# Altium PCB LC_LPF_PI.PcbDoc
Units mm, origin at the board's own origin, x right, y up, seen from the top; angles counter-clockwise.
Board outline 239 x 65.7 mm, 2 copper layers (Top Layer, Bottom Layer); 125 components, 51 nets, 250 pads, 73 vias.
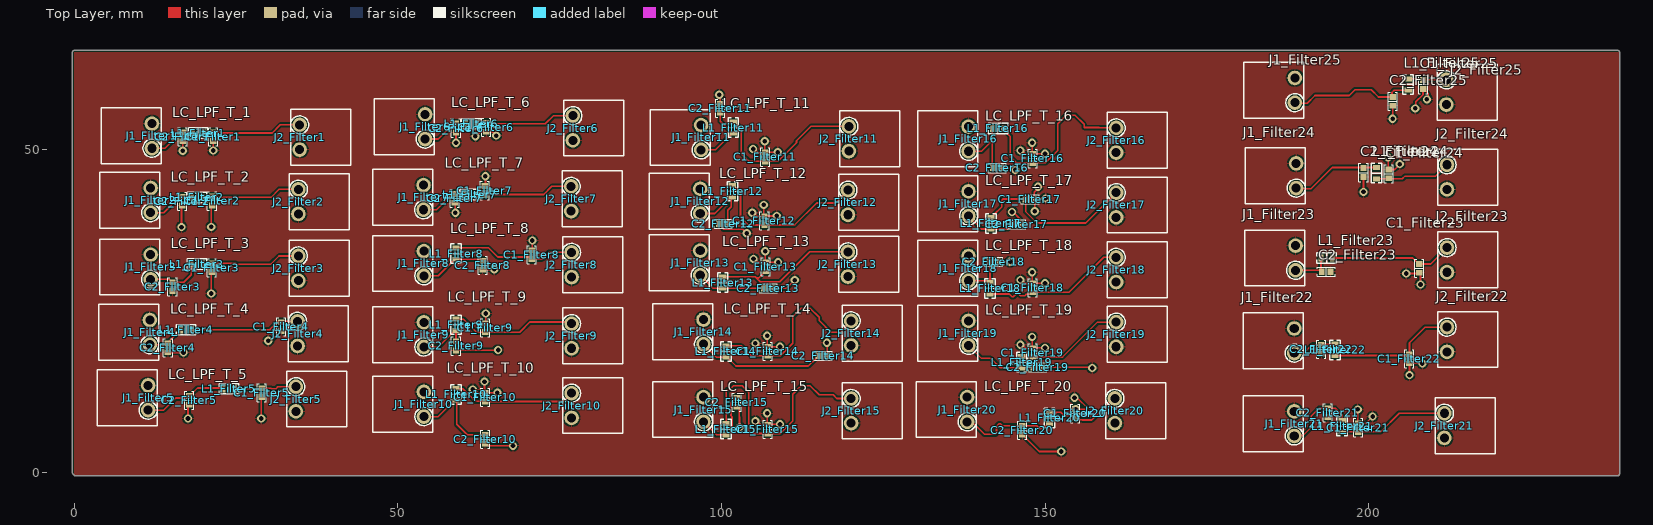
[diagram p0: Top Layer view]
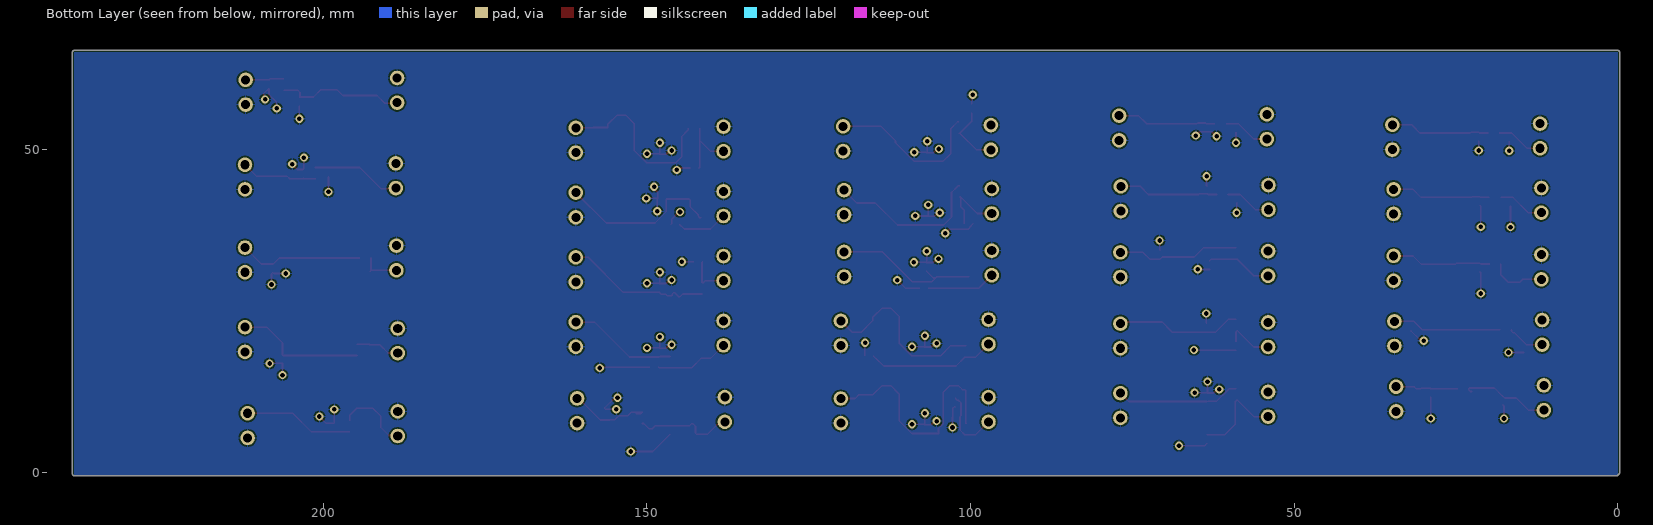
[diagram p1: Bottom Layer view, seen from below]
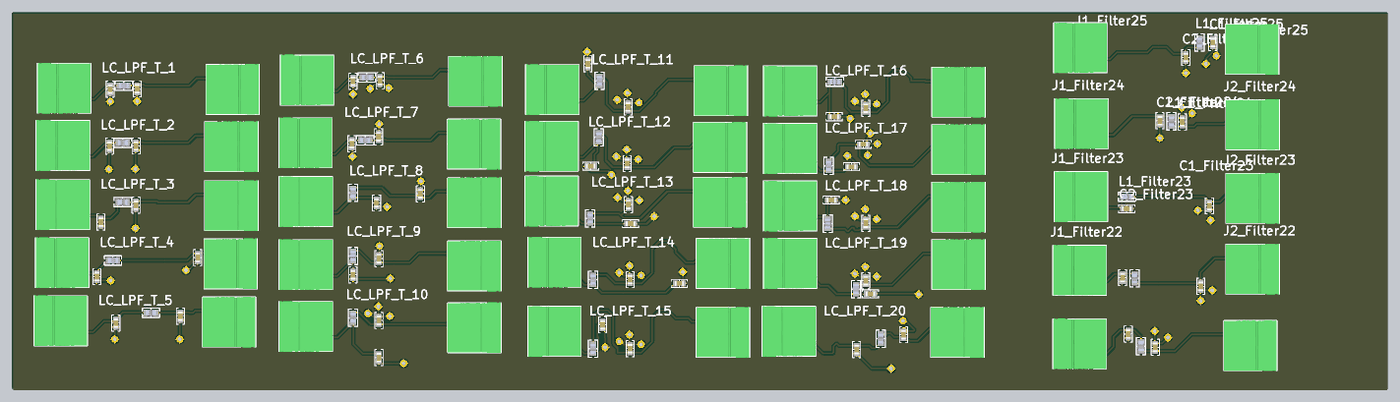
[diagram p2: 3D render of the assembled board from above, using the file's embedded part models]

## Layer stack, top to bottom
Top Solder: solder mask 0.0102, Solder Resist, Dk 3.5
Top Layer: signal copper 0.0356
Dielectric 1: dielectric 0.32, FR-4, Dk 4.8
Bottom Layer: signal copper 0.0356
Bottom Solder: solder mask 0.0102, Solder Resist, Dk 3.5

## Board outline
-0.046,-0.246 cw(c0,0) -0.25,0 -0.25,65 cw(c0,65) 0,65.25 238.5,65.25 cw(c238.5,65) 238.75,65 238.75,-0.2 cw(c238.5,-0.2) 238.5,-0.45 0.2,-0.45 cw(c0.2,-0.2)

## Design rules (kind name [scope] priority, off if disabled: settings)
Clearance [All] p1: gap=0.254 ignorepadtopadclearanceinfootprint=FALSE except(0: Arc-Hole Track-Hole SMDPad-Hole THPad-Hole Via-Hole Fill-Hole Poly-Hole Region-Hole Text-Hole)
PolygonConnect [All] p1: connectstyle=Relief reliefconductorwidth=0.254 reliefentries=4 polygonreliefangle="90 Angle" airgapwidth=0.254
RoutingVias [All] p1: holewidth=0.711 width=1.27 viastyle="Through Hole" minholewidth=0.711 minwidth=1.27 maxholewidth=0.711 maxwidth=1.27
SolderMaskExpansion [All] p1: expansion=0.102 istentingtop=FALSE
Width [All] p1: maxlimit=0.254 minlimit=0.254 preferedwidth=0.254
30 further rules are at their usual default settings.

## Classes and differential pairs
component class Filter25: C1_Filter25 C2_Filter25 J1_Filter25 J2_Filter25 L1_Filter25
component class Filter24: C1_Filter24 C2_Filter24 J1_Filter24 J2_Filter24 L1_Filter24
component class Filter23: C1_Filter23 C2_Filter23 J1_Filter23 J2_Filter23 L1_Filter23
component class Filter22: C1_Filter22 C2_Filter22 J1_Filter22 J2_Filter22 L1_Filter22
component class Filter21: C1_Filter21 C2_Filter21 J1_Filter21 J2_Filter21 L1_Filter21
channel class LC_LPF_PI: Filter1 Filter2 Filter3 Filter4 Filter5 Filter6 Filter7 Filter8 Filter9 Filter10 Filter11 Filter12 Filter13 Filter14 Filter15 Filter16 Filter17 Filter18 Filter19 Filter20 Filter21 Filter22 Filter23 Filter24 Filter25
component class Filter20: C1_Filter20 C2_Filter20 J1_Filter20 J2_Filter20 L1_Filter20
component class Filter19: C1_Filter19 C2_Filter19 J1_Filter19 J2_Filter19 L1_Filter19
component class Filter18: C1_Filter18 C2_Filter18 J1_Filter18 J2_Filter18 L1_Filter18
component class Filter17: C1_Filter17 C2_Filter17 J1_Filter17 J2_Filter17 L1_Filter17
component class Filter16: C1_Filter16 C2_Filter16 J1_Filter16 J2_Filter16 L1_Filter16
component class Filter15: C1_Filter15 C2_Filter15 J1_Filter15 J2_Filter15 L1_Filter15
component class Filter14: C1_Filter14 C2_Filter14 J1_Filter14 J2_Filter14 L1_Filter14
component class Filter13: C1_Filter13 C2_Filter13 J1_Filter13 J2_Filter13 L1_Filter13
component class Filter12: C1_Filter12 C2_Filter12 J1_Filter12 J2_Filter12 L1_Filter12
component class Filter11: C1_Filter11 C2_Filter11 J1_Filter11 J2_Filter11 L1_Filter11
component class Filter10: C1_Filter10 C2_Filter10 J1_Filter10 J2_Filter10 L1_Filter10
component class Filter9: C1_Filter9 C2_Filter9 J1_Filter9 J2_Filter9 L1_Filter9
component class Filter8: C1_Filter8 C2_Filter8 J1_Filter8 J2_Filter8 L1_Filter8
component class Filter7: C1_Filter7 C2_Filter7 J1_Filter7 J2_Filter7 L1_Filter7
component class Filter6: C1_Filter6 C2_Filter6 J1_Filter6 J2_Filter6 L1_Filter6
component class Filter5: C1_Filter5 C2_Filter5 J1_Filter5 J2_Filter5 L1_Filter5
component class Filter4: C1_Filter4 C2_Filter4 J1_Filter4 J2_Filter4 L1_Filter4
component class Filter3: C1_Filter3 C2_Filter3 J1_Filter3 J2_Filter3 L1_Filter3
component class Filter2: C1_Filter2 C2_Filter2 J1_Filter2 J2_Filter2 L1_Filter2
component class Filter1: C1_Filter1 C2_Filter1 J1_Filter1 J2_Filter1 L1_Filter1

## Components (designator, comment, footprint, x,y, rotation, side; value= is the part's Value field where it differs from the comment)
C1_Filter1 "10 µF" "CAP 0603_1608" 21.5,51.95 r90 top (schematic designator C1)
C1_Filter2 "10 µF" "CAP 0603_1608" 21.305,42.002 r90 top (schematic designator C1)
C1_Filter3 "10 µF" "CAP 0603_1608" 21.293,31.706 r90 top (schematic designator C1)
C1_Filter4 "10 µF" "CAP 0603_1608" 32,22.6 r90 top (schematic designator C1)
C1_Filter5 "10 µF" "CAP 0603_1608" 29.005,12.402 r90 top (schematic designator C1)
C1_Filter6 "10 µF" "CAP 0603_1608" 63.705,53.375 r90 top (schematic designator C1)
C1_Filter7 "10 µF" "CAP 0603_1608" 63.445,43.617 r270 top (schematic designator C1)
C1_Filter8 "10 µF" "CAP 0603_1608" 70.7,33.7 r270 top (schematic designator C1)
C1_Filter9 "10 µF" "CAP 0603_1608" 63.5,22.417 r270 top (schematic designator C1)
C1_Filter10 "10 µF" "CAP 0603_1608" 63.5,11.667 r270 top (schematic designator C1)
C1_Filter11 "10 µF" "CAP 0603_1608" 106.8,48.8 r270 top (schematic designator C1)
C1_Filter12 "10 µF" "CAP 0603_1608" 106.658,38.958 r270 top (schematic designator C1)
C1_Filter13 "10 µF" "CAP 0603_1608" 106.858,31.816 r270 top (schematic designator C1)
C1_Filter14 "10 µF" "CAP 0603_1608" 107.158,18.764 r270 top (schematic designator C1)
C1_Filter15 "10 µF" "CAP 0603_1608" 107.158,6.764 r270 top (schematic designator C1)
C1_Filter16 "10 µF" "CAP 0603_1608" 148.1,48.569 r270 top (schematic designator C1)
C1_Filter17 "10 µF" "CAP 0603_1608" 147.669,42.3 r180 top (schematic designator C1)
C1_Filter18 "10 µF" "CAP 0603_1608" 148.1,28.569 r270 top (schematic designator C1)
C1_Filter19 "10 µF" "CAP 0603_1608" 148.1,18.569 r270 top (schematic designator C1)
C1_Filter20 "10 µF" "CAP 0603_1608" 154.65,9.175 r270 top (schematic designator C1)
C1_Filter21 "10 µF" "CAP 0603_1608" 198.4,7 r270 top (schematic designator C1)
C1_Filter22 "10 µF" "CAP 0603_1608" 206.3,17.6 r90 top (schematic designator C1)
C1_Filter23 "10 µF" "CAP 0603_1608" 207.8,31.6 r90 top (schematic designator C1)
C1_Filter24 "10 µF" "CAP 0603_1608" 203.1,46.2 r270 top (schematic designator C1)
C1_Filter25 "10 µF" "CAP 0603_1608" 208.4,60 r90 top (schematic designator C1)
C2_Filter1 "10 µF" "CAP 0603_1608" 16.8,51.9 r90 top (schematic designator C2)
C2_Filter2 "10 µF" "CAP 0603_1608" 16.7,41.975 r90 top (schematic designator C2)
C2_Filter3 "10 µF" "CAP 0603_1608" 15.2,28.775 r90 top (schematic designator C2)
C2_Filter4 "10 µF" "CAP 0603_1608" 14.5,19.3 r90 top (schematic designator C2)
C2_Filter5 "10 µF" "CAP 0603_1608" 17.8,11.2 r90 top (schematic designator C2)
C2_Filter6 "10 µF" "CAP 0603_1608" 59,53.275 r90 top (schematic designator C2)
C2_Filter7 "10 µF" "CAP 0603_1608" 58.8,42.4 r90 top (schematic designator C2)
C2_Filter8 "10 µF" "CAP 0603_1608" 63.1,32.1 r90 top (schematic designator C2)
C2_Filter9 "10 µF" "CAP 0603_1608" 59,19.6 r90 top (schematic designator C2)
C2_Filter10 "10 µF" "CAP 0603_1608" 63.5,5.2 r90 top (schematic designator C2)
C2_Filter11 "10 µF" "CAP 0603_1608" 99.8,56.3 r270 top (schematic designator C2)
C2_Filter12 "10 µF" "CAP 0603_1608" 100.3,38.5 r0 top (schematic designator C2)
C2_Filter13 "10 µF" "CAP 0603_1608" 107.225,28.5 r180 top (schematic designator C2)
C2_Filter14 "10 µF" "CAP 0603_1608" 115.7,18.1 r180 top (schematic designator C2)
C2_Filter15 "10 µF" "CAP 0603_1608" 102.362,10.885 r90 top (schematic designator C2)
C2_Filter16 "10 µF" "CAP 0603_1608" 142.625,47.1 r180 top (schematic designator C2)
C2_Filter17 "10 µF" "CAP 0603_1608" 145.6,38.4 r180 top (schematic designator C2)
C2_Filter18 "10 µF" "CAP 0603_1608" 142.1,32.6 r180 top (schematic designator C2)
C2_Filter19 "10 µF" "CAP 0603_1608" 148.9,16.3 r180 top (schematic designator C2)
C2_Filter20 "10 µF" "CAP 0603_1608" 146.5,6.6 r90 top (schematic designator C2)
C2_Filter21 "10 µF" "CAP 0603_1608" 193.7,9.3 r90 top (schematic designator C2)
C2_Filter22 "10 µF" "CAP 0603_1608" 192.7,19.1 r90 top (schematic designator C2)
C2_Filter23 "10 µF" "CAP 0603_1608" 193.425,31.1 r180 top (schematic designator C2)
C2_Filter24 "10 µF" "CAP 0603_1608" 199.2,46.4 r90 top (schematic designator C2)
C2_Filter25 "10 µF" "CAP 0603_1608" 203.7,57.4 r90 top (schematic designator C2)
J1_Filter1 "OQ0232510000G" "FCI 06-381-2PIN" 8.726,52.049 r90 top (schematic designator J1)
J1_Filter2 "OQ0232510000G" "FCI 06-381-2PIN" 8.531,42.101 r90 top (schematic designator J1)
J1_Filter3 "OQ0232510000G" "FCI 06-381-2PIN" 8.519,31.805 r90 top (schematic designator J1)
J1_Filter4 "OQ0232510000G" "FCI 06-381-2PIN" 8.394,21.705 r90 top (schematic designator J1)
J1_Filter5 "OQ0232510000G" "FCI 06-381-2PIN" 8.131,11.601 r90 top (schematic designator J1)
J1_Filter6 "OQ0232510000G" "FCI 06-381-2PIN" 50.931,53.474 r90 top (schematic designator J1)
J1_Filter7 "OQ0232510000G" "FCI 06-381-2PIN" 50.676,42.549 r90 top (schematic designator J1)
J1_Filter8 "OQ0232510000G" "FCI 06-381-2PIN" 50.731,32.349 r90 top (schematic designator J1)
J1_Filter9 "OQ0232510000G" "FCI 06-381-2PIN" 50.731,21.349 r90 top (schematic designator J1)
J1_Filter10 "OQ0232510000G" "FCI 06-381-2PIN" 50.731,10.599 r90 top (schematic designator J1)
J1_Filter11 "OQ0232510000G" "FCI 06-381-2PIN" 93.573,51.816 r90 top (schematic designator J1)
J1_Filter12 "OQ0232510000G" "FCI 06-381-2PIN" 93.431,41.974 r90 top (schematic designator J1)
J1_Filter13 "OQ0232510000G" "FCI 06-381-2PIN" 93.431,32.432 r90 top (schematic designator J1)
J1_Filter14 "OQ0232510000G" "FCI 06-381-2PIN" 93.931,21.78 r90 top (schematic designator J1)
J1_Filter15 "OQ0232510000G" "FCI 06-381-2PIN" 93.931,9.78 r90 top (schematic designator J1)
J1_Filter16 "OQ0232510000G" "FCI 06-381-2PIN" 134.873,51.585 r90 top (schematic designator J1)
J1_Filter17 "OQ0232510000G" "FCI 06-381-2PIN" 134.873,41.585 r90 top (schematic designator J1)
J1_Filter18 "OQ0232510000G" "FCI 06-381-2PIN" 134.873,31.585 r90 top (schematic designator J1)
J1_Filter19 "OQ0232510000G" "FCI 06-381-2PIN" 134.873,21.585 r90 top (schematic designator J1)
J1_Filter20 "OQ0232510000G" "FCI 06-381-2PIN" 134.673,9.785 r90 top (schematic designator J1)
J1_Filter21 "OQ0232510000G" "FCI 06-381-2PIN" 185.2,7.6 r90 top (schematic designator J1)
J1_Filter22 "OQ0232510000G" "FCI 06-381-2PIN" 185.2,20.4 r90 top (schematic designator J1)
J1_Filter23 "OQ0232510000G" "FCI 06-381-2PIN" 185.4,33.2 r90 top (schematic designator J1)
J1_Filter24 "OQ0232510000G" "FCI 06-381-2PIN" 185.5,45.9 r90 top (schematic designator J1)
J1_Filter25 "OQ0232510000G" "FCI 06-381-2PIN" 185.3,59.1 r90 top (schematic designator J1)
J2_Filter1 "OQ0232510000G" "FCI 06-381-2PIN" 38.15,51.85 r270 top (schematic designator J2)
J2_Filter2 "OQ0232510000G" "FCI 06-381-2PIN" 37.955,41.902 r270 top (schematic designator J2)
J2_Filter3 "OQ0232510000G" "FCI 06-381-2PIN" 37.943,31.606 r270 top (schematic designator J2)
J2_Filter4 "OQ0232510000G" "FCI 06-381-2PIN" 37.818,21.506 r270 top (schematic designator J2)
J2_Filter5 "OQ0232510000G" "FCI 06-381-2PIN" 37.555,11.402 r270 top (schematic designator J2)
J2_Filter6 "OQ0232510000G" "FCI 06-381-2PIN" 80.355,53.275 r270 top (schematic designator J2)
J2_Filter7 "OQ0232510000G" "FCI 06-381-2PIN" 80.1,42.35 r270 top (schematic designator J2)
J2_Filter8 "OQ0232510000G" "FCI 06-381-2PIN" 80.155,32.15 r270 top (schematic designator J2)
J2_Filter9 "OQ0232510000G" "FCI 06-381-2PIN" 80.155,21.15 r270 top (schematic designator J2)
J2_Filter10 "OQ0232510000G" "FCI 06-381-2PIN" 80.155,10.4 r270 top (schematic designator J2)
J2_Filter11 "OQ0232510000G" "FCI 06-381-2PIN" 122.997,51.617 r270 top (schematic designator J2)
J2_Filter12 "OQ0232510000G" "FCI 06-381-2PIN" 122.855,41.775 r270 top (schematic designator J2)
J2_Filter13 "OQ0232510000G" "FCI 06-381-2PIN" 122.855,32.233 r270 top (schematic designator J2)
J2_Filter14 "OQ0232510000G" "FCI 06-381-2PIN" 123.355,21.581 r270 top (schematic designator J2)
J2_Filter15 "OQ0232510000G" "FCI 06-381-2PIN" 123.355,9.581 r270 top (schematic designator J2)
J2_Filter16 "OQ0232510000G" "FCI 06-381-2PIN" 164.297,51.386 r270 top (schematic designator J2)
J2_Filter17 "OQ0232510000G" "FCI 06-381-2PIN" 164.297,41.386 r270 top (schematic designator J2)
J2_Filter18 "OQ0232510000G" "FCI 06-381-2PIN" 164.297,31.386 r270 top (schematic designator J2)
J2_Filter19 "OQ0232510000G" "FCI 06-381-2PIN" 164.297,21.386 r270 top (schematic designator J2)
J2_Filter20 "OQ0232510000G" "FCI 06-381-2PIN" 164.097,9.586 r270 top (schematic designator J2)
J2_Filter21 "OQ0232510000G" "FCI 06-381-2PIN" 215,7.3 r270 top (schematic designator J2)
J2_Filter22 "OQ0232510000G" "FCI 06-381-2PIN" 215.402,20.605 r270 top (schematic designator J2)
J2_Filter23 "OQ0232510000G" "FCI 06-381-2PIN" 215.4,32.9 r270 top (schematic designator J2)
J2_Filter24 "OQ0232510000G" "FCI 06-381-2PIN" 215.402,45.695 r270 top (schematic designator J2)
J2_Filter25 "OQ0232510000G" "FCI 06-381-2PIN" 215.3,58.8 r270 top (schematic designator J2)
L1_Filter1 "47µH" "IND 0603_1608 RF WW" 19.175,52.5 r180 top (schematic designator L1)
L1_Filter2 "47µH" "IND 0603_1608 RF WW" 18.98,42.552 r180 top (schematic designator L1)
L1_Filter3 "47µH" "IND 0603_1608 RF WW" 18.968,32.256 r180 top (schematic designator L1)
L1_Filter4 "47µH" "IND 0603_1608 RF WW" 17.3,22.1 r180 top (schematic designator L1)
L1_Filter5 "47µH" "IND 0603_1608 RF WW" 23.9,13 r180 top (schematic designator L1)
L1_Filter6 "47µH" "IND 0603_1608 RF WW" 61.38,53.925 r180 top (schematic designator L1)
L1_Filter7 "47µH" "IND 0603_1608 RF WW" 61.125,43 r180 top (schematic designator L1)
L1_Filter8 "47µH" "IND 0603_1608 RF WW" 59,33.875 r270 top (schematic designator L1)
L1_Filter9 "47µH" "IND 0603_1608 RF WW" 59,22.875 r270 top (schematic designator L1)
L1_Filter10 "47µH" "IND 0603_1608 RF WW" 59,12.125 r270 top (schematic designator L1)
L1_Filter11 "47µH" "IND 0603_1608 RF WW" 101.842,53.342 r270 top (schematic designator L1)
L1_Filter12 "47µH" "IND 0603_1608 RF WW" 101.7,43.5 r270 top (schematic designator L1)
L1_Filter13 "47µH" "IND 0603_1608 RF WW" 100.2,29.4 r270 top (schematic designator L1)
L1_Filter14 "47µH" "IND 0603_1608 RF WW" 100.7,18.748 r270 top (schematic designator L1)
L1_Filter15 "47µH" "IND 0603_1608 RF WW" 100.7,6.748 r270 top (schematic designator L1)
L1_Filter16 "47µH" "IND 0603_1608 RF WW" 142.725,53.2 r180 top (schematic designator L1)
L1_Filter17 "47µH" "IND 0603_1608 RF WW" 141.642,38.553 r270 top (schematic designator L1)
L1_Filter18 "47µH" "IND 0603_1608 RF WW" 141.5,28.5 r90 top (schematic designator L1)
L1_Filter19 "47µH" "IND 0603_1608 RF WW" 146.4,17.1 r270 top (schematic designator L1)
L1_Filter20 "47µH" "IND 0603_1608 RF WW" 150.7,8.5 r270 top (schematic designator L1)
L1_Filter21 "47µH" "IND 0603_1608 RF WW" 195.9,7.2 r90 top (schematic designator L1)
L1_Filter22 "47µH" "IND 0603_1608 RF WW" 194.8,19 r90 top (schematic designator L1)
L1_Filter23 "47µH" "IND 0603_1608 RF WW" 193.5,33.2 r180 top (schematic designator L1)
L1_Filter24 "47µH" "IND 0603_1608 RF WW" 201.2,46.3 r90 top (schematic designator L1)
L1_Filter25 "47µH" "IND 0603_1608 RF WW" 206.1,60 r270 top (schematic designator L1)

## Footprints (in the part's own frame and the unit in brackets; to place one, negate y for a bottom-side part, rotate by r counter-clockwise, add the part's x,y. Pads: shape width x height; smd on the part's side, far side on the other; paste and mask are expansions set on the pad)
"CAP 0603_1608" [mm] "Chip Capacitor, 2-Leads, Body 1.60x0.80mm, IPC Medium Density"
  rect 0.9x1 smd: 1(-0.675,0) 2(0.675,0)
  silkscreen extent -1.4,-0.7 1.4,0.7, body extent -0.8,-0.41 0.8,0.41, height 0.82
"FCI 06-381-2PIN" [mm] "FCI Pluggable Terminal Block"
  round 2.25 hole 1.4: 1(-1.905,-3.302) 2(1.905,-3.302)
  silkscreen extent -4.32,-4.7 4.32,4.57, body extent -4.4,-4.7 4.4,4.5, height 7.6
"IND 0603_1608 RF WW" [mm] "Chip Inductor, 2-Leads, Body 1.65x0.99mm, IPC Medium Density"
  rect 0.76x1.13 smd: 1(-0.875,0) 2(0.875,0)
  silkscreen extent -1.5,-0.8 1.5,0.8, body extent -0.84,-0.58 0.83,0.58, height 1

## Part data
C1_Filter1 C1_Filter2 C1_Filter3 C1_Filter4 C1_Filter5 C1_Filter6 C1_Filter7 C1_Filter8 C1_Filter9 C1_Filter10 C1_Filter11 C1_Filter12 C1_Filter13 C1_Filter14 C1_Filter15 C1_Filter16 C1_Filter17 C1_Filter18 C1_Filter19 C1_Filter20 C1_Filter21 C1_Filter22 C1_Filter23 C1_Filter24 C1_Filter25 C2_Filter1 C2_Filter2 C2_Filter3 C2_Filter4 C2_Filter5 C2_Filter6 C2_Filter7 C2_Filter8 C2_Filter9 C2_Filter10 C2_Filter11 C2_Filter12 C2_Filter13 C2_Filter14 C2_Filter15 C2_Filter16 C2_Filter17 C2_Filter18 C2_Filter19 C2_Filter20 C2_Filter21 C2_Filter22 C2_Filter23 C2_Filter24 C2_Filter25: library part MD0603BW106M100NHT-EM, "CAP CER 10UF 10V X5R 0603", Device Package="0603 (1608 Metric)", manufacturer="Knowles Novacap", Operating Temperature="-55°C ~ 85°C", Supplier Part Number 1=1763-MD0603BW106M100NHT-EMCT-ND, Temperature Coefficient=X5R, Tolerance=±20%, Voltage - Rated=10V, Applications="Medical, Non-Critical", Capacitance="10 µF", componentlink1description=Datasheet, componentlink1url="https://mm.digikey.com/Volume0/opasdata/d220001/medias/docus/5546/MD Series R3.pdf", componentlink2description="DigiKey Link", componentlink2url=https://www.digikey.com/en/products/detail/knowles-novacap/MD0603BW106M100NHT-EM/21406876, lastupdated="02/11/2023 19:09:18", Lifecycle Status=Active, Minimum Order=1, Mounting Type="Surface Mount, MLCC", Package / Case="0603 (1608 Metric)", packaging=TapeAndReel, Part Number=MD0603BW106M100NHT-EM, partid=56748, price=0.24, series=MD, Supplier 1=DigiKey
J1_Filter1 J1_Filter2 J1_Filter3 J1_Filter4 J1_Filter5 J1_Filter6 J1_Filter7 J1_Filter8 J1_Filter9 J1_Filter10 J1_Filter11 J1_Filter12 J1_Filter13 J1_Filter14 J1_Filter15 J1_Filter16 J1_Filter17 J1_Filter18 J1_Filter19 J1_Filter20 J1_Filter21 J1_Filter22 J1_Filter23 J1_Filter24 J1_Filter25 J2_Filter1 J2_Filter2 J2_Filter3 J2_Filter4 J2_Filter5 J2_Filter6 J2_Filter7 J2_Filter8 J2_Filter9 J2_Filter10 J2_Filter11 J2_Filter12 J2_Filter13 J2_Filter14 J2_Filter15 J2_Filter16 J2_Filter17 J2_Filter18 J2_Filter19 J2_Filter20 J2_Filter21 J2_Filter22 J2_Filter23 J2_Filter24 J2_Filter25: "TERM BLOCK HDR 2POS 90DEG 3.81MM", Color=Green, Current - UL=10A, manufacturer="Amphenol Anytek", Operating Temperature="-40°C ~ 115°C", Supplier Part Number 1=609-3819-ND, Voltage - UL=300V, componentlink1description=Datasheet, componentlink1url=http://portal.fciconnect.com/Comergent//fci/drawing/oqxx32x100j0g.pdf, componentlink2description="DigiKey Link", componentlink2url=//digikey.com/product-detail/en/amphenol-anytek/OQ0232510000G/609-3819-ND/2261255, Contact Mating Finish=Tin, Header Orientation="90°, Right Angle", lastupdated="16/12/2019 19:14:30", Lifecycle Status=0, Minimum Order=1, Mounting Type="Through Hole", Number of Levels=1, Number of Positions=2, packaging=Bulk, Part Number=OQ0232510000G, Part Status=Active, Pitch="0.150\" (3.81mm)", Positions Per Level=2, price=0.49, series=06-381, Supplier 1=DigiKey, Termination Style=Solder, Type="Header, Male Pins, Shrouded (4 Side)"
L1_Filter1 L1_Filter2 L1_Filter3 L1_Filter4 L1_Filter5 L1_Filter6 L1_Filter7 L1_Filter8 L1_Filter9 L1_Filter10 L1_Filter11 L1_Filter12 L1_Filter13 L1_Filter14 L1_Filter15 L1_Filter16 L1_Filter17 L1_Filter18 L1_Filter19 L1_Filter20 L1_Filter21 L1_Filter22 L1_Filter23 L1_Filter24 L1_Filter25: library part L0603B470MPWFT, "INDUCTORPOWER LINE 0603 47H 20%", Current Rating (Amps)=90mA, DC Resistance (DCR)=5.8Ohm, Device Package="0603 (1608 Metric)", Frequency - Self Resonant=11MHz, Inductance Frequency - Test=2.52MHz, manufacturer=KEMET, Operating Temperature="-40°C ~ 105°C", Supplier Part Number 1=399-17776-1-ND, Tolerance=±20%, componentlink1description=Datasheet, componentlink1url=https://api.kemet.com/component-edge/download/datasheet/L0603B470MPWFT.pdf, componentlink2description="DigiKey Link", componentlink2url=http://digikey.com/product-detail/en/kemet/L0603B470MPWFT/399-17776-1-ND/8601439, Height - Seated (Max)="0.035\" (0.90mm)", Inductance=47µH, lastupdated="06/09/2020 11:05:20", Lifecycle Status=Active, Material - Core=Ferrite, Minimum Order=1, Mounting Type="Surface Mount", Package / Case="0603 (1608 Metric)", packaging=TapeAndReel, Part Number=L0603B470MPWFT, Part Status=Active, partid=1309, price=0.14, series=L-PWF, Shielding=Unshielded, Size / Dimension="0.063\" L x 0.031\" W (1.60mm x 0.80mm)", Supplier 1=DigiKey, Supplier Device Package="0603 (1608 Metric)", Type=Wirewound

## Via types
v1: diameter 1.27, hole 0.711, Top Layer to Bottom Layer, 73 vias

## Nets (pads, with @x,y where several pads share a name; then routed paths per layer and width w, separated by ;. In a path a pad name is that pad's centre, name@x,y a point inside that pad or via, vN(x,y) a via of type N, cw(c..) or ccw(c..) an arc to the next point about the centre after c; other vN are vias at no path point)
GND: C1_Filter1.1 C1_Filter2.1 C1_Filter3.1 C1_Filter4.1 C1_Filter5.1 C1_Filter6.1 C1_Filter7.1 C1_Filter8.1 C1_Filter9.1 C1_Filter10.1 C1_Filter11.1 C1_Filter12.1 C1_Filter13.1 C1_Filter14.1 C1_Filter15.1 C1_Filter16.1 C1_Filter17.1 C1_Filter18.1 C1_Filter19.1 C1_Filter20.1 C1_Filter21.1 C1_Filter22.1 C1_Filter23.1 C1_Filter24.1 C1_Filter25.1 C2_Filter1.1 C2_Filter2.1 C2_Filter3.1 C2_Filter4.1 C2_Filter5.1 C2_Filter6.1 C2_Filter7.1 C2_Filter8.1 C2_Filter9.1 C2_Filter10.1 C2_Filter11.1 C2_Filter12.1 C2_Filter13.1 C2_Filter14.1 C2_Filter15.1 C2_Filter16.1 C2_Filter17.1 C2_Filter18.1 C2_Filter19.1 C2_Filter20.1 C2_Filter21.1 C2_Filter22.1 C2_Filter23.1 C2_Filter24.1 C2_Filter25.1 J1_Filter1.2 J1_Filter2.2 J1_Filter3.2 J1_Filter4.2 J1_Filter5.2 J1_Filter6.2 J1_Filter7.2 J1_Filter8.2 J1_Filter9.2 J1_Filter10.2 J1_Filter11.2 J1_Filter12.2 J1_Filter13.2 J1_Filter14.2 J1_Filter15.2 J1_Filter16.2 J1_Filter17.2 J1_Filter18.2 J1_Filter19.2 J1_Filter20.2 J1_Filter21.2 J1_Filter22.2 J1_Filter23.2 J1_Filter24.2 J1_Filter25.2 J2_Filter1.2 J2_Filter2.2 J2_Filter3.2 J2_Filter4.2 J2_Filter5.2 J2_Filter6.2 J2_Filter7.2 J2_Filter8.2 J2_Filter9.2 J2_Filter10.2 J2_Filter11.2 J2_Filter12.2 J2_Filter13.2 J2_Filter14.2 J2_Filter15.2 J2_Filter16.2 J2_Filter17.2 J2_Filter18.2 J2_Filter19.2 J2_Filter20.2 J2_Filter21.2 J2_Filter22.2 J2_Filter23.2 J2_Filter24.2 J2_Filter25.2 | length 175.7
  Top Layer w0.254: C2_Filter4.1 14.525,18.6 v1(16.9,18.6) ; v1(16.595,37.973) C2_Filter2.1@16.595,41.195 ; v1(16.8,49.75) C2_Filter1.1 ; v1(17.6,8.4) 17.6,10.325 C2_Filter5.1 ; v1(21.188,27.704) 21.188,30.926 C1_Filter3.1 ; v1(21.2,38) 21.2,41.222 C1_Filter2.1 ; v1(21.5,49.8) C1_Filter1.1 ; v1(28.9,8.4) 28.9,11.622 C1_Filter5.1 ; v1(30,20.4) 30.194,20.594 30.619,20.594 31.95,21.925 C1_Filter4.1 ; C2_Filter7.1 58.9,41.625 v1(58.9,40.2) ; C2_Filter9.1 65.446,18.925 v1(65.501,18.98) ; v1(59,51) C2_Filter6.1 ; v1(61.6,12.898) 61.875,12.898 62.431,12.342 C1_Filter10.1 ; v1(62,52) 62.037,52 62.737,52.7 C1_Filter6.1 64.586,52.7 65.186,52.1 v1(65.2,52.1) ; C2_Filter8.1 64.896,31.425 v1(64.911,31.44) ; v1(63.4,14.098) 63.4,12.442 C1_Filter10.1 ; C1_Filter7.1 63.545,44.392 v1(63.545,45.817) ; C2_Filter10.1 63.823,4.202 67.798,4.202 v1(67.8,4.2) ; C1_Filter9.1 63.6,23.192 v1(63.6,24.617) ; v1(65.4,12.398) 63.556,12.398 C1_Filter10.1 ; C1_Filter8.1 70.8,34.475 v1(70.8,35.9) ; C2_Filter12.1 99.625,38.475 100.144,37.956 100.144,37.842 100.367,37.619 103.281,37.619 v1(103.9,37) ; v1(99.68,58.399) 99.8,58.279 C2_Filter11.1 ; C2_Filter15.1 102.372,10.2 102.5,10.2 102.735,9.965 102.735,8.711 102.8,8.646 v1(102.8,7) ; v1(104.758,40.189) 105.033,40.189 105.589,39.633 C1_Filter12.1 ; v1(104.9,50.031) 105.175,50.031 105.731,49.475 C1_Filter11.1 ; v1(104.958,33.047) 105.233,33.047 105.789,32.491 C1_Filter13.1 ; v1(105.258,7.995) 105.533,7.995 106.089,7.439 C1_Filter15.1 ; v1(105.258,19.995) 105.533,19.995 106.089,19.439 C1_Filter14.1 ; C1_Filter12.1@106.558,39.633 C1_Filter12.1 ; v1(106.558,41.389) 106.558,39.733 C1_Filter12.1 ; C1_Filter11.1@106.7,49.475 C1_Filter11.1 ; v1(106.7,51.231) 106.7,49.575 C1_Filter11.1 ; C1_Filter13.1@106.758,32.491 C1_Filter13.1 ; v1(106.758,34.247) 106.758,32.591 C1_Filter13.1 ; C1_Filter15.1@107.058,7.439 C1_Filter15.1 ; v1(107.058,9.195) 107.058,7.539 C1_Filter15.1 ; C1_Filter14.1@107.058,19.439 C1_Filter14.1 ; v1(107.058,21.195) 107.058,19.539 C1_Filter14.1 ; C2_Filter13.1 110.057,28.5 v1(111.343,29.785) ; v1(108.558,39.689) 106.714,39.689 C1_Filter12.1 ; v1(108.7,49.531) 106.856,49.531 C1_Filter11.1 ; v1(108.758,32.547) 106.914,32.547 C1_Filter13.1 ; v1(109.058,7.495) 107.214,7.495 C1_Filter15.1 ; v1(109.058,19.495) 107.214,19.495 C1_Filter14.1 ; v1(116.3,20.1) 116.293,20.093 116.293,19.963 116.375,19.881 C2_Filter14.1 ; C2_Filter18.1 v1(144.6,32.6) ; C2_Filter16.1 145.1,47.1 v1(145.4,46.8) ; v1(144.9,40.3) 145.093,40.3 146.193,39.2 146.193,38.482 C2_Filter17.1 ; v1(146.2,19.8) 146.475,19.8 147.031,19.244 C1_Filter19.1 ; v1(146.2,29.8) 146.475,29.8 147.031,29.244 C1_Filter18.1 ; v1(146.2,49.8) 146.475,49.8 147.031,49.244 C1_Filter16.1 ; C2_Filter20.1 149.125,3.3 v1(152.5,3.3) ; C1_Filter19.1@148,19.244 C1_Filter19.1 ; v1(148,21) 148,19.344 C1_Filter19.1 ; C1_Filter18.1@148,29.244 C1_Filter18.1 ; v1(148,31) 148,29.344 C1_Filter18.1 ; C1_Filter16.1@148,49.244 C1_Filter16.1 ; v1(148,51) 148,49.344 C1_Filter16.1 ; C1_Filter17.1@148.344,42.4 C1_Filter17.1 ; v1(148.4,40.4) 148.4,42.244 C1_Filter17.1 ; v1(148.9,44.2) 148.9,43.925 148.344,43.369 C1_Filter17.1 ; C2_Filter19.1 157.2,16.3 v1(157.3,16.2) ; v1(150,19.3) 148.156,19.3 C1_Filter19.1 ; v1(150,29.3) 148.156,29.3 C1_Filter18.1 ; v1(150,49.3) 148.156,49.3 C1_Filter16.1 ; v1(150.1,42.4) 148.444,42.4 C1_Filter17.1 ; v1(154.55,11.606) 154.744,11.412 155.15,11.412 156.549,10.013 156.375,9.839 v1(154.731,9.839) ; v1(198.3,9.8) 198.3,7.775 C1_Filter21.1 199.575,7.675 v1(200.6,8.7) ; v1(199.2,43.4) C2_Filter24.1 ; v1(203,48.7) 203,46.975 C1_Filter24.1 204.009,46.875 204.8,47.666 v1(204.8,47.7) ; v1(203.7,54.7) C2_Filter25.1 ; v1(205.8,30.8) 207.675,30.8 C1_Filter23.1 208,30.725 v1(208,29.1) ; v1(206.3,15.1) C1_Filter22.1 208.275,16.925 v1(208.3,16.9) ; v1(207.2,56.3) 207.279,56.379 207.279,57.316 208.4,58.437 C1_Filter25.1 208.45,59.325 209.182,58.593 209.182,57.882 v1(209,57.7)
IN_Filter1: C2_Filter1.2 J1_Filter1.1 L1_Filter1.2 | length 7.2
  Top Layer w0.254: J1_Filter1.1 14.044,50.144 16.4,52.5 L1_Filter1.2
IN_Filter2: C2_Filter2.2 J1_Filter2.1 L1_Filter2.2 | length 7.2
  Top Layer w0.254: J1_Filter2.1 13.849,40.196 16.205,42.552 L1_Filter2.2
IN_Filter3: C2_Filter3.2 J1_Filter3.1 L1_Filter3.2 | length 8.6
  Top Layer w0.254: J1_Filter3.1 14.7,29.9 15.15,29.45 C2_Filter3.2 16.95,29.45 18.093,30.593 L1_Filter3.2
IN_Filter4: C2_Filter4.2 J1_Filter4.1 L1_Filter4.2 | length 5.8
  Top Layer w0.254: J1_Filter4.1 14.125,19.8 15.987,21.662 16.172,21.662 16.425,21.915 L1_Filter4.2
IN_Filter5: C2_Filter5.2 J1_Filter5.1 L1_Filter5.2 | length 13.8
  Top Layer w0.254: J1_Filter5.1 13.862,9.696 15.724,11.558 17.483,11.558 C2_Filter5.2 17.85,11.875 19.075,13.1 22.925,13.1 L1_Filter5.2 23.025,12.815 22.772,12.562 22.587,12.562
IN_Filter6: C2_Filter6.2 J1_Filter6.1 L1_Filter6.2 | length 7.2
  Top Layer w0.254: J1_Filter6.1 56.249,51.569 58.605,53.925 L1_Filter6.2
IN_Filter7: C2_Filter7.2 J1_Filter7.1 L1_Filter7.2 | length 7.2
  Top Layer w0.254: J1_Filter7.1 55.994,40.644 58.35,43 L1_Filter7.2
IN_Filter8: C2_Filter8.2 J1_Filter8.1 L1_Filter8.2 | length 10.2
  Top Layer w0.254: J1_Filter8.1 56.259,30.444 58.815,33 L1_Filter8.2 62.875,33 C2_Filter8.2
IN_Filter9: C2_Filter9.2 J1_Filter9.1 L1_Filter9.2 | length 7.6
  Top Layer w0.254: J1_Filter9.1 56.259,19.444 58.815,22 59,21.815 C2_Filter9.2
IN_Filter10: C2_Filter10.2 J1_Filter10.1 L1_Filter10.2 | length 14.8
  Top Layer w0.254: J1_Filter10.1 56.259,8.694 58.815,11.25 58.847,11.25 59.1,10.997 59.1,7.5 60.725,5.875 C2_Filter10.2
IN_Filter11: C2_Filter11.2 J1_Filter11.1 L1_Filter11.2 | length 10
  Top Layer w0.254: J1_Filter11.1 99.101,49.911 L1_Filter11.2@101.657,52.467 ; C2_Filter11.2 99.8,54.324 L1_Filter11.2@101.657,52.467 ; L1_Filter11.2 L1_Filter11.2@101.657,52.467
IN_Filter12: C2_Filter12.2 J1_Filter12.1 L1_Filter12.2 | length 10.5
  Top Layer w0.254: J1_Filter12.1 98.959,40.069 101.515,42.625 L1_Filter12.2 101.5,42.425 101.5,41.1 100.975,40.575 C2_Filter12.2
IN_Filter13: C2_Filter13.2 J1_Filter13.1 L1_Filter13.2 | length 10.7
  Top Layer w0.254: J1_Filter13.1 98.735,28.525 L1_Filter13.2 100.225,28.5 C2_Filter13.2
IN_Filter14: C2_Filter14.2 J1_Filter14.1 L1_Filter14.2 | length 19.9
  Top Layer w0.254: J1_Filter14.1 99.235,17.873 L1_Filter14.2 100.885,17.873 102.258,16.5 113.425,16.5 114.652,17.727 114.702,17.727 115.025,18.05 C2_Filter14.2
IN_Filter15: C2_Filter15.2 J1_Filter15.1 L1_Filter15.2 | length 11
  Top Layer w0.254: J1_Filter15.1 99.235,5.873 L1_Filter15.2 100.885,5.873 101.646,6.634 101.646,8.643 101.481,8.808 101.481,10.818 101.9,11.237 102.039,11.237 C2_Filter15.2
IN_Filter16: C2_Filter16.2 J1_Filter16.1 L1_Filter16.2 | length 10.5
  Top Layer w0.254: J1_Filter16.1 140.18,49.68 141.85,51.35 ; L1_Filter16.2 141.85,51.35 ; C2_Filter16.2 141.85,47.2 141.85,51.35
IN_Filter17: C2_Filter17.2 J1_Filter17.1 L1_Filter17.2 | length 7.9
  Top Layer w0.254: J1_Filter17.1 140.177,37.678 L1_Filter17.2 144.253,37.678 144.925,38.35 C2_Filter17.2
IN_Filter18: C2_Filter18.2 J1_Filter18.1 L1_Filter18.2 | length 6.7
  Top Layer w0.254: J1_Filter18.1 141.01,29.68 141.315,29.375 L1_Filter18.2 141.5,32.525 C2_Filter18.2
IN_Filter19: C2_Filter19.2 J1_Filter19.1 L1_Filter19.2 | length 11.5
  Top Layer w0.254: J1_Filter19.1 140.177,17.678 141.642,17.678 143.095,16.225 L1_Filter19.2 148.15,16.225 C2_Filter19.2
IN_Filter20: C2_Filter20.2 J1_Filter20.1 L1_Filter20.2 | length 15.5
  Top Layer w0.254: J1_Filter20.1 138.357,7.498 139.093,7.498 140.645,5.947 142.347,5.947 142.5,6.1 142.5,7.2 142.895,7.595 143.105,7.595 143.425,7.275 C2_Filter20.2 148.725,7.275 149.195,6.805 149.695,6.805 150.515,7.625 L1_Filter20.2
IN_Filter21: C2_Filter21.2 J1_Filter21.1 L1_Filter21.2 | length 11.5
  Top Layer w0.254: J1_Filter21.1 188.566,5.759 189.859,5.759 191.1,7 191.1,8.724 192.351,9.975 C2_Filter21.2 194.825,9.975 195.9,8.9 L1_Filter21.2
IN_Filter22: C2_Filter22.2 J1_Filter22.1 L1_Filter22.2 | length 6.8
  Top Layer w0.254: J1_Filter22.1 188.515,18.508 190.008,18.508 191.275,19.775 C2_Filter22.2 ; C2_Filter22.2@192.75,19.725 192.9,19.875 L1_Filter22.2
IN_Filter23: C2_Filter23.2 J1_Filter23.1 L1_Filter23.2 | length 6.1
  Top Layer w0.254: J1_Filter23.1 192.555,31.295 C2_Filter23.2@192.625,31.225 ; L1_Filter23.2 C2_Filter23.2@192.625,31.225 ; C2_Filter23.2 C2_Filter23.2@192.625,31.225
IN_Filter24: C2_Filter24.2 J1_Filter24.1 L1_Filter24.2 | length 13.8
  Top Layer w0.254: J1_Filter24.1 188.897,43.9 191.1,43.9 194.375,47.175 198.7,47.175 L1_Filter24.2
IN_Filter25: C2_Filter25.2 J1_Filter25.1 L1_Filter25.2 | length 19.9
  Top Layer w0.254: J1_Filter25.1 188.697,57.1 190.5,57.1 191.7,58.3 197,58.3 197.9,59.2 200.4,59.2 201.525,58.075 C2_Filter25.2 203.6,58.175 203.6,58.775 203.95,59.125 L1_Filter25.2
OUT_Filter1: C1_Filter1.2 J2_Filter1.1 L1_Filter1.1 | length 15.4
  Top Layer w0.254: L1_Filter1.1 21.375,52.5 C1_Filter1.2 22.7,52.625 22.825,52.5 30.6,52.5 31.855,53.755 J2_Filter1.1
OUT_Filter2: C1_Filter2.2 J2_Filter2.1 L1_Filter2.1 | length 15.4
  Top Layer w0.254: L1_Filter2.1 21.18,42.552 C1_Filter2.2 22.505,42.677 22.63,42.552 30.405,42.552 31.66,43.807 J2_Filter2.1
OUT_Filter3: C1_Filter3.2 J2_Filter3.1 L1_Filter3.1 | length 15.5
  Top Layer w0.254: L1_Filter3.1 21.168,32.256 C1_Filter3.2 24.919,32.381 25.1,32.2 30.337,32.2 31.648,33.511 J2_Filter3.1
OUT_Filter4: C1_Filter4.2 J2_Filter4.1 L1_Filter4.1 | length 16.9
  Top Layer w0.254: L1_Filter4.1 30.212,22.1 31.523,23.411 J2_Filter4.1
OUT_Filter5: C1_Filter5.2 J2_Filter5.1 L1_Filter5.1 | length 9.7
  Top Layer w0.254: L1_Filter5.1 28.928,13 C1_Filter5.2 30.423,13.077 30.5,13 31.175,13 31.482,13.307 J2_Filter5.1
OUT_Filter6: C1_Filter6.2 J2_Filter6.1 L1_Filter6.1 | length 15.4
  Top Layer w0.254: L1_Filter6.1 63.58,53.925 C1_Filter6.2 64.905,54.05 65.03,53.925 72.805,53.925 74.06,55.18 J2_Filter6.1
OUT_Filter7: C1_Filter7.2 J2_Filter7.1 L1_Filter7.1 | length 15.4
  Top Layer w0.254: L1_Filter7.1 63.325,43 63.45,43.125 64.65,43.125 64.775,43 72.55,43 73.805,44.255 J2_Filter7.1
OUT_Filter8: C1_Filter8.2 J2_Filter8.1 L1_Filter8.1 | length 19
  Top Layer w0.254: L1_Filter8.1 64.05,34.75 65.452,33.348 70.377,33.348 C1_Filter8.2 72.325,33.025 73.4,34.1 76.808,34.1 J2_Filter8.1
OUT_Filter9: C1_Filter9.2 J2_Filter9.1 L1_Filter9.1 | length 19.4
  Top Layer w0.254: L1_Filter9.1 60.15,23.75 62.158,21.742 C1_Filter9.2 68.842,21.742 70.4,23.3 76.608,23.3 J2_Filter9.1
OUT_Filter10: C1_Filter10.2 J2_Filter10.1 L1_Filter10.1 | length 19.1
  Top Layer w0.254: L1_Filter10.1 60.05,13 62,11.05 C1_Filter10.2@63.38,11.05 ; C1_Filter10.2 63.533,11.025 75.573,11.025 J2_Filter10.1
OUT_Filter11: C1_Filter11.2 J2_Filter11.1 L1_Filter11.1 | length 25
  Top Layer w0.254: L1_Filter11.1 102.027,54.217 103.09,53.154 103.09,49.31 104.275,48.125 C1_Filter11.2 108.731,48.125 111.6,50.994 111.6,51.3 113.822,53.522 J2_Filter11.1
OUT_Filter12: C1_Filter12.2 J2_Filter12.1 L1_Filter12.1 | length 24.9
  Top Layer w0.254: L1_Filter12.1 101.885,44.375 102.948,43.312 102.948,39.468 104.133,38.283 C1_Filter12.2 111.3,38.283 114.717,41.7 117.573,41.7 J2_Filter12.1
OUT_Filter13: C1_Filter13.2 J2_Filter13.1 L1_Filter13.1 | length 23.5
  Top Layer w0.254: L1_Filter13.1 105.225,30.275 105.4,30.1 ; C1_Filter13.2 106.808,31.141 105.767,30.1 105.4,30.1 ; J2_Filter13.1 119.55,34.136 113.636,34.136 109,29.5 106,29.5 105.4,30.1
OUT_Filter14: C1_Filter14.2 J2_Filter14.1 L1_Filter14.1 | length 28
  Top Layer w0.254: L1_Filter14.1 103.099,19.623 104.633,18.089 C1_Filter14.2 109.089,18.089 111,20 111,24.148 112.3,25.448 113.7,25.448 115.1,24.048 115.1,23.546 116.915,21.731 118.298,21.731 J2_Filter14.1
OUT_Filter15: C1_Filter15.2 J2_Filter15.1 L1_Filter15.1 | length 37.4
  Top Layer w0.254: L1_Filter15.1 100.758,7.681 100.758,12.715 100.907,12.864 101.258,12.864 101.858,13.464 103.226,13.464 104.242,12.448 104.242,7.574 104.958,6.858 104.958,6.089 C1_Filter15.2 109.089,6.089 111,8 111,12.148 112.3,13.448 113.7,13.448 115.1,12.048 117.256,12.048 117.818,11.486 J2_Filter15.1
OUT_Filter16: C1_Filter16.2 J2_Filter16.1 L1_Filter16.1 | length 28.1
  Top Layer w0.254: L1_Filter16.1 143.6,53.015 144.644,51.971 144.644,48.825 145.575,47.894 C1_Filter16.2 150.031,47.894 151.942,49.805 151.942,53.953 153.242,55.253 154.642,55.253 156.042,53.853 156.042,53.351 158.338,53.351 158.4,53.289 160.992,53.289 J2_Filter16.1
OUT_Filter17: C1_Filter17.2 J2_Filter17.1 L1_Filter17.1 | length 25.9
  Top Layer w0.254: L1_Filter17.1 141.827,39.428 142.08,39.681 142.08,39.866 143.3,41.086 143.3,42.1 143.5,42.3 C1_Filter17.2 146.994,40.369 148.763,38.6 156.304,38.6 J2_Filter17.1
OUT_Filter18: C1_Filter18.2 J2_Filter18.1 L1_Filter18.1 | length 22.7
  Top Layer w0.254: L1_Filter18.1 144.475,27.625 144.895,27.205 145.105,27.205 145.7,27.8 145.91,27.8 146.1,27.61 146.1,27.449 146.214,27.334 146.852,27.334 147.089,27.571 147.777,27.571 C1_Filter18.2 153.694,27.894 159.091,33.291 J2_Filter18.1
OUT_Filter19: C1_Filter19.2 J2_Filter19.1 L1_Filter19.1 | length 16.9
  Top Layer w0.254: L1_Filter19.1 148.019,17.975 C1_Filter19.2 152.706,17.894 158.103,23.291 J2_Filter19.1
OUT_Filter20: C1_Filter20.2 J2_Filter20.1 L1_Filter20.1 | length 13
  Top Layer w0.254: 151.646,9.159 150.916,9.159 L1_Filter20.1 152.432,9.375 152.983,8.823 154.327,8.823 C1_Filter20.2 154.973,8.177 155.736,8.177 155.753,8.161 157.224,8.161 160.554,11.491 J2_Filter20.1
OUT_Filter21: C1_Filter21.2 J2_Filter21.1 L1_Filter21.1 | length 17
  Top Layer w0.254: L1_Filter21.1 C1_Filter21.2 201.825,6.325 204.705,9.205 J2_Filter21.1
OUT_Filter22: C1_Filter22.2 J2_Filter22.1 L1_Filter22.1 | length 20
  Top Layer w0.254: L1_Filter22.1 C1_Filter22.2@206.225,18.125 ; C1_Filter22.2 206.3,20.1 208.71,22.51 J2_Filter22.1
OUT_Filter23: C1_Filter23.2 J2_Filter23.1 L1_Filter23.1 | length 19.2
  Top Layer w0.254: L1_Filter23.1 206.825,33.2 207.75,32.275 C1_Filter23.2 209.568,32.275 J2_Filter23.1
OUT_Filter24: C1_Filter24.2 J2_Filter24.1 L1_Filter24.1 | length 11.7
  Top Layer w0.254: L1_Filter24.1 203,45.425 C1_Filter24.2 ; C1_Filter24.2@203.2,45.425 205.2,45.425 205.623,45.848 210.348,45.848 J2_Filter24.1
OUT_Filter25: C1_Filter25.2 J2_Filter25.1 L1_Filter25.1 | length 6
  Top Layer w0.254: L1_Filter25.1 208.2,60.875 C1_Filter25.2 208.43,60.705 J2_Filter25.1

## Polygon pours and split planes (outlines as drawn)
GND on Bottom Layer "BOT_GND" (solid, pour order 1): 0,-0.45 238.5,-0.45 238.5,65 0,65
GND on Top Layer "TOP_GND" (solid, pour order 0): 0,-0.45 238.75,-0.45 238.75,65 0,65

## Silkscreen, mask and mechanical layers (free items; w line width, h text height)
Top Overlay:
  text "LC_LPF_T_6" at 58.254,56.508 h1.52
  text "LC_LPF_T_11" at 100.219,56.351 h1.52
  text "LC_LPF_T_1" at 15.154,54.908 h1.52
  text "LC_LPF_T_16" at 140.789,54.412 h1.52
  text "LC_LPF_T_7" at 57.287,47.16 h1.52
  text "LC_LPF_T_12" at 99.699,45.507 h1.52
  text "LC_LPF_T_2" at 14.959,44.96 h1.52
  text "LC_LPF_T_17" at 140.789,44.412 h1.52
  text "LC_LPF_T_8" at 58.124,37.005 h1.52
  text "LC_LPF_T_13" at 100.144,35.036 h1.52
  text "LC_LPF_T_3" at 14.947,34.664 h1.52
  text "LC_LPF_T_18" at 140.789,34.412 h1.52
  text "LC_LPF_T_9" at 57.733,26.459 h1.52
  text "LC_LPF_T_4" at 14.822,24.564 h1.52
  text "LC_LPF_T_14" at 100.367,24.564 h1.52
  text "LC_LPF_T_19" at 140.789,24.412 h1.52
  text "LC_LPF_T_10" at 57.566,15.466 h1.52
  text "LC_LPF_T_5" at 14.559,14.46 h1.52
  text "LC_LPF_T_20" at 140.589,12.612 h1.52
  text "LC_LPF_T_15" at 99.847,12.606 h1.52
Mechanical 1:
  lines w0.5: 0,0 0.2,-0.2